# Altium PCB mchf_pro_rf.PcbDoc (part 2 of 4)
Units mm, origin at the board's own origin, x right, y up, seen from the top; angles counter-clockwise.
Board outline 200 x 140.01 mm, 2 copper layers (Top Layer, Bottom Layer); 387 components, 251 nets, 1103 pads, 620 vias.
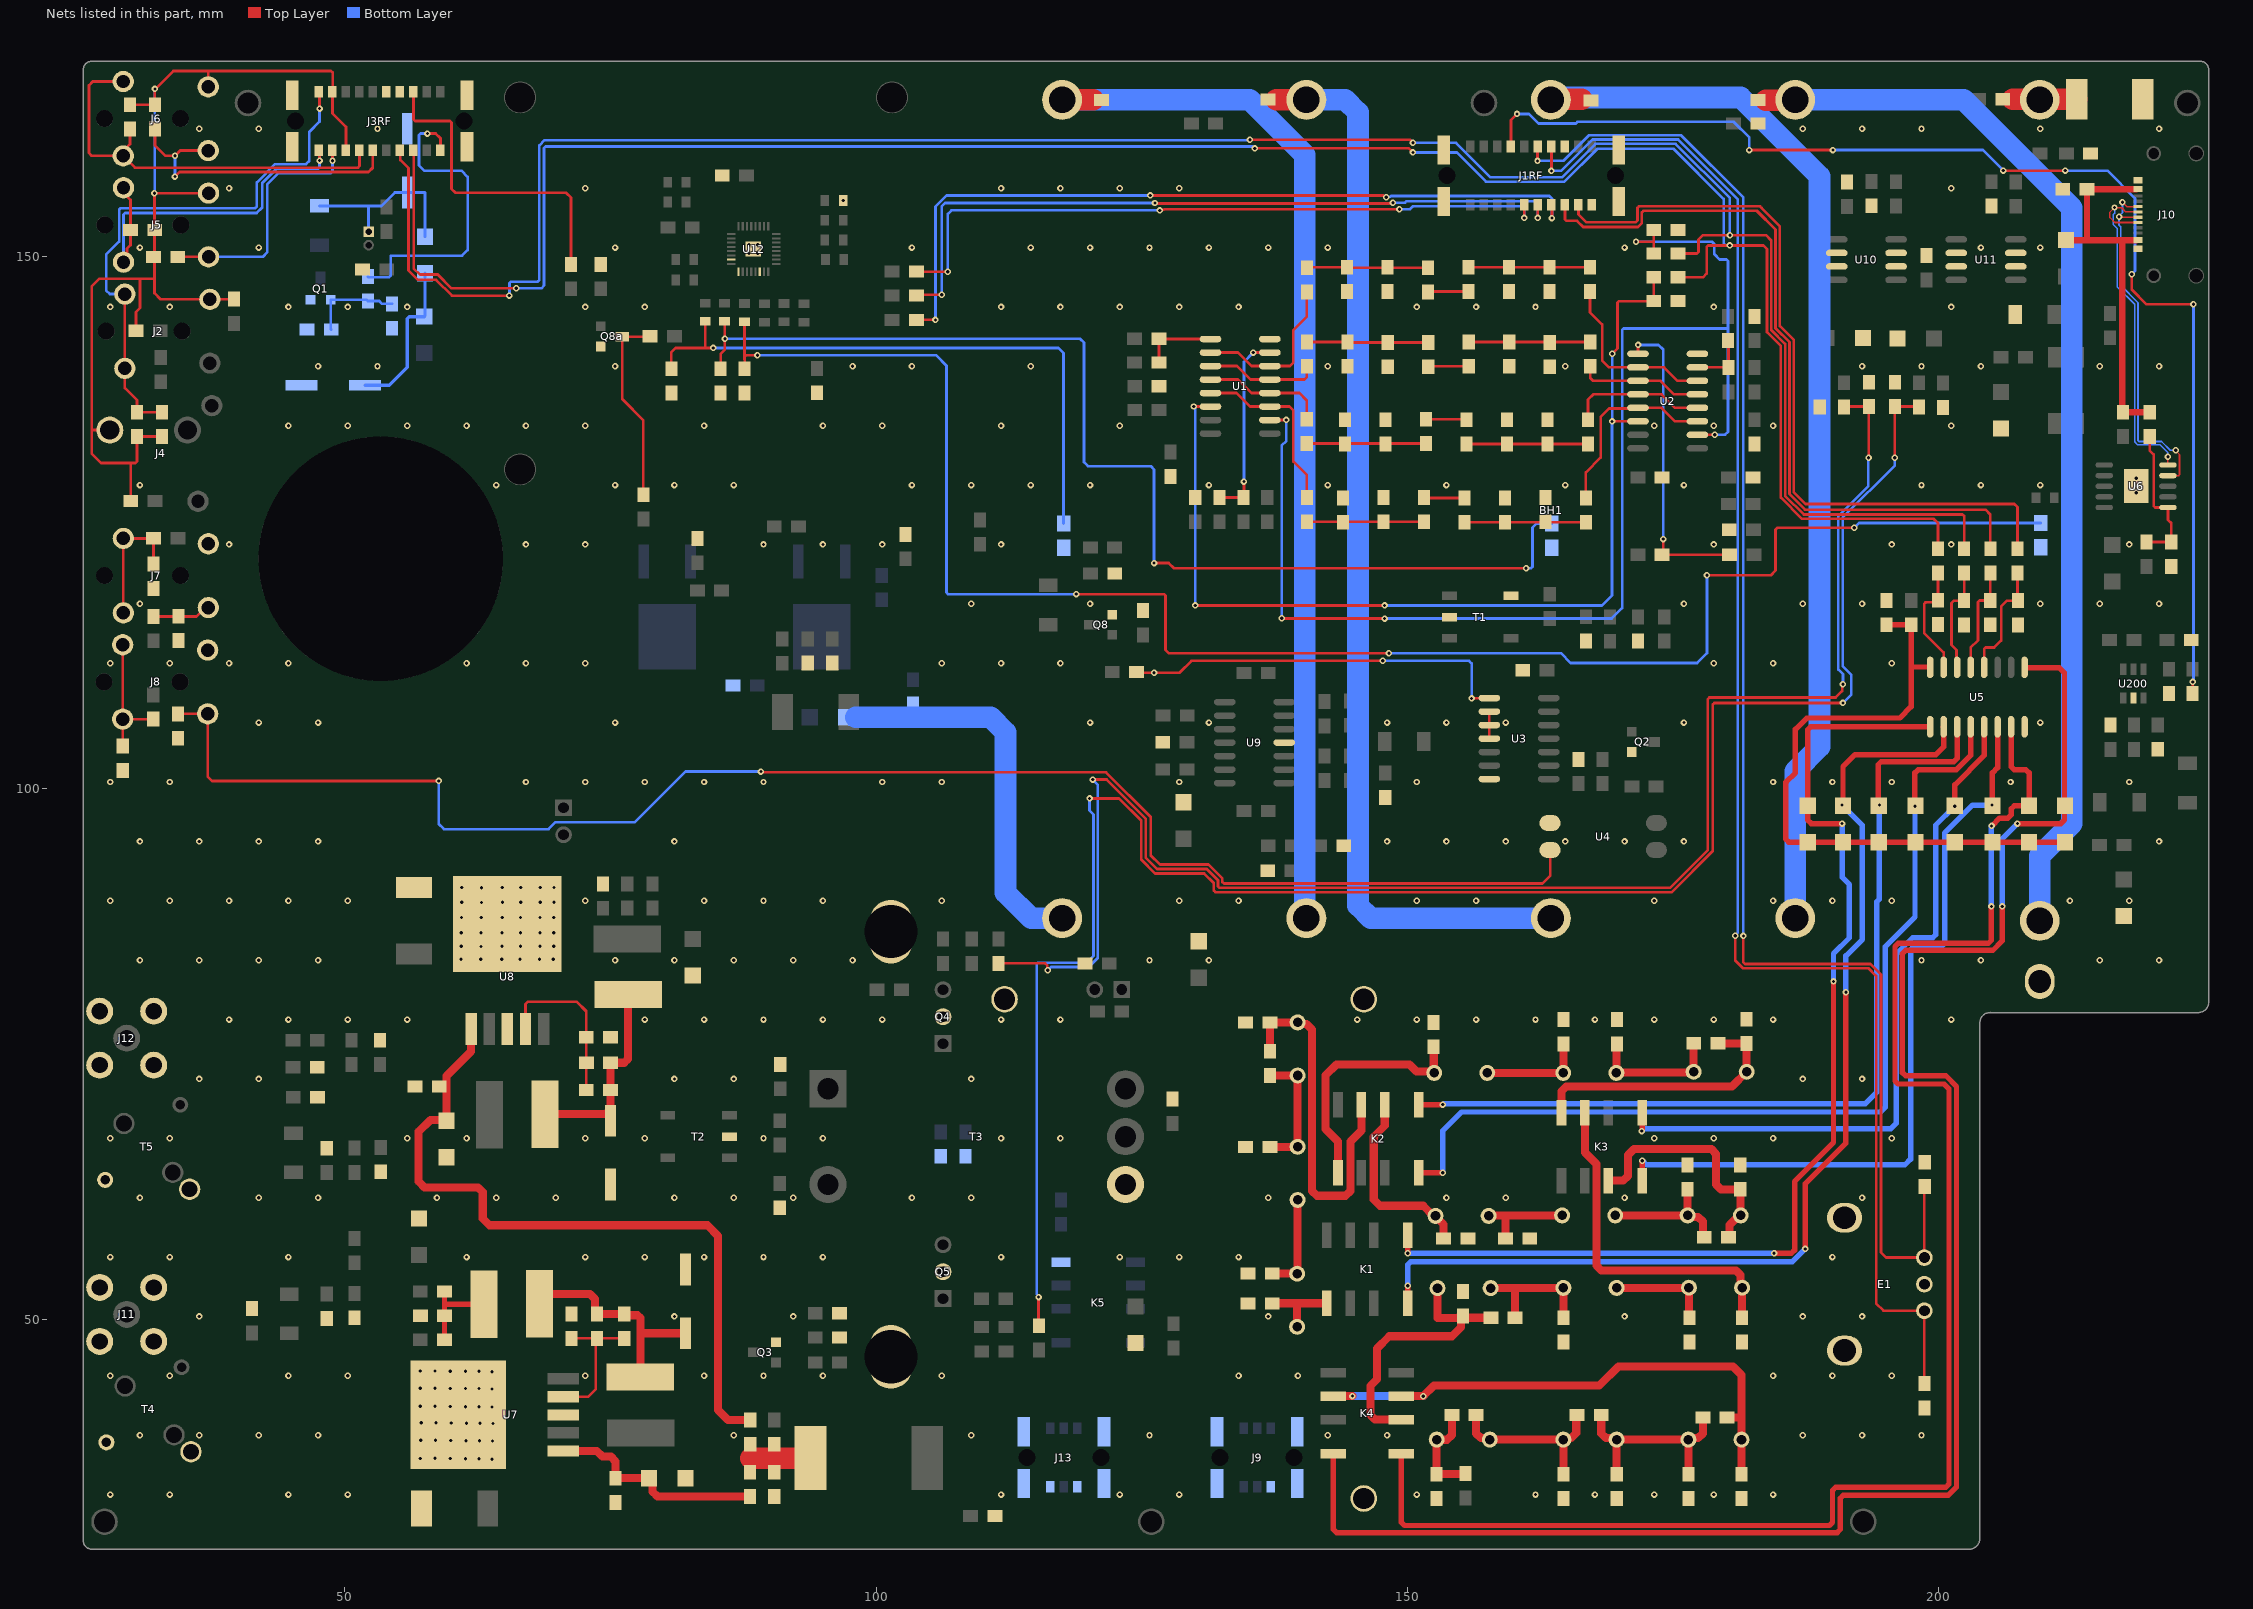
[diagram p2: the nets of this part, all layers, seen from the top]

## Part data
BH1: library part BATT_HOLDER_5S_21700, "LiOn 21700 5S Holder"
C1 C2 C3 C4 C5 C6 C7 C8 C9 C10 C11 C12 C13 C14 C15 C16 C17 C18 C19 C20 C21 C22 C23 C24 C25 C26 C27 C28 C29 C29d C29e C30 C31 C32 C33 C34 C35 C36 C37 C38 C38a C39 C40 C41 C42 C43 C44 C45 C46 C47 C76 C77 C91 C110 C111 C127 C128 C129 C130 C200 C201 C500: library part CAP, "Capacitor"
  C1 C2 C3 C4 C5 C6 C19 C20 C21 C22 C23 C24 C25 C26 C27 C28 C38 C38a C43 C44 C45 C46 C47 C76 C77 C91 C110 C111 C127 C128 C500: Price=0.068, QT Order=QCC-00154
  C7 C15: Notes=COG/NPO, Price=0.124, QT Order=QCC-00082
  C8 C16: Notes=COG/NPO, Price=0.074, QT Order=QCC-00147
  C9 C12 C17: Notes=COG/NPO, Price=0.078, QT Order=QCC-00125
  C10 C13 C18: Notes=COG/NPO, Price=0.058, QT Order=QCC-00084
  C11: Notes=COG/NPO, Price=0.074
  C14: Notes=COG/NPO, Price=0.074, QT Order=QCC-00069
  C29 C29d C29e C30 C31 C32 C33 C34 C35 C36 C37: Order="FN 185-6408", Price=0.01, QT Order=QCC-00259
  C39 C40 C41 C42: Price=0.01, QT Order=QCC-00259
  C129 C130: Price=0.115, QT Order=QCC-00103
  C200 C201: Order="FN 282-1264", Price=0.089, QT Order=QCC-00157
C29a C29b: library part CAP-POL, "Electrolitic capacitor", Price=0.34
  C29a: Order="FN 225-4321", QT Order=QCC-00320
  C29b: Notes="Aluminium capacitor"
C48 C49 C50 C51 C52 C53 C54 C55 C56 C57 C58 C59 C60 C61 C62 C63 C64 C65 C66 C67 C68 C69 C70 C71 C72 C73 C74 C75 C78 C79 C80 C82 C84 C85 C87 C89 C90 C92 C93 C94 C94a C95 C97 C98 C99 C100 C101 C102 C103 C105 C106 C108 C109 C114 C115 C116 C117 C118 C119 C119a C120 C121 C122 C123 C124 C125 C125a C125b C125c C125d C125e C132 C133 C136: library part CAP, "Capacitor", Voltage=100V
  C48 C49 C50 C51 C52 C53 C54 C55 C56 C57 C58 C59 C60 C61 C62 C63 C64 C65 C71 C72 C73 C75: Notes=COG/NPO
  C66 C70: Notes=COG/NPO, Price=0.063, QT Order=QCC-00460
  C67 C68: Notes=COG/NPO, Price=0.143, QT Order=QCC-00142
  C69: Notes=COG/NPO, Price=0.068
  C74: Notes=COG/NPO, Price=0.078, QT Order=QCC-00125
  C78 C79 C80 C82 C84 C85 C87 C89 C90 C92 C93 C94 C94a C95 C97 C98 C99 C100 C101 C102 C103 C105 C106 C108 C109 C114 C115 C116 C117 C125a C125b C125c C125d C125e C132 C133: Price=0.068, QT Order=QCC-00154
C81 C86 C104 C107: library part CAP-POL, "Electrolitic capacitor", Voltage=25V
  C81 C86 C107: Price=0.235, QT Order=QCC-00202
  C104: Price=0.204, QT Order=QCC-00166
C83 C88 C96 C112 C113: library part CAP-POL, "Electrolitic capacitor", Voltage=16V, Price=0.235, QT Order=QCC-00202
D1 D2 D5 D9 D200 D202: "DIODE, SCHOTTKY, 1A, 60V, SOD-123F", QT Order=QCD-00034
  D1 D2 D5 D9: Price=0.085
  D200 D202: Order="FN 151-0694", Price=0.262, QT Price=0.08
D2a D3 D4 D6: library part PMEG6010CEH, "DIODE, SCHOTTKY, 1A, 60V, SOD-123F", Price=0.085, QT Order=QCD-00034
D7 D8: library part PMEG6010CEH, "RF DIODE SCHOTTKY 70V, SOD-123F", Order="DK 1N5711W-FDITR-ND", Price=0.085, QT Order=QCD-00034
E1: library part Encoder, "ALPS Rotary Encoder"
F1 F2: library part Fuse, "Fuse", Function=Fuse, Price=0.134, QT Order=QCI-00216
HS1: library part RD16HHF1_DUAL_HEATSINK, "RF MOSFET x2 heatsink", Order="EB 121171160336", Price=7.375
J1RF J3RF: "SMD male connector, nominal current: 2.2 A, Test voltage: 840 VAC, number of positions: 20, pitch: 1.27 mm, color: black, contact surface: Gold, type of contact: Male connector, mounting: SMD soldering", Manufacturer_Name="Phoenix Contact", Mouser Part Number=651-1373866, Datasheet Link=http://www.phoenixcontact.com/gb/produkte/1373866, Geometry.Height=6.75mm, Manufacturer_Part_Number=1373866, Mouser Price/Stock=https://www.mouser.co.uk/ProductDetail/Phoenix-Contact/1373866?qs=2SLPxufLcgAs0enIXKjUUw%3D%3D
J2 J5 J6: library part MX-387GL, "Jack Socket,Thru-Hole", Order="FN 126-7376"
J4: library part PhoneJack, "Jack Socket 4 pin", Function=Phones, Order="FN 121-7016", Price=1.28
J7 J8: library part Phonejack3, "Jack Socket,Thru-Hole", Notes="post assembly", Price=0.35
  J7: Function=Paddles
  J8: Function=ACC
J9 J13: "SMD male connector, nominal current: 2.2 A, Test voltage: 840 VAC, number of positions: 6, pitch: 1.27 mm, color: black, contact surface: Gold, type of contact: Male connector, mounting: SMD soldering", Manufacturer_Name="Phoenix Contact", Mouser Part Number=651-1373826, Datasheet Link=http://www.phoenixcontact.com/gb/produkte/1373826, Geometry.Height=6.75mm, Manufacturer_Part_Number=1373826, Mouser Price/Stock=https://www.mouser.co.uk/ProductDetail/Phoenix-Contact/1373826?qs=2SLPxufLcgB13Clq%252BEBMrA%3D%3D
J10: "Universal Serial Bus (USB) Shielded I/O Receptacle, Type C, Vertical, Surface Mount, Height 8.8mm, 16 Circuits, Gold (Au) Flash Plating", Manufacturer_Name=Molex, Mouser Part Number=538-219320-0001, Datasheet Link=https://www.molex.com/content/dam/molex/molex-dot-com/products/automated/en-us/salesdrawingpdf/219/219320/2193200001_sd.pdf?inline, Geometry.Height=9.05mm, Manufacturer_Part_Number=219320-0001, Mouser Price/Stock=https://www.mouser.co.uk/ProductDetail/Molex/219320-0001?qs=rQFj71Wb1eXha8qVBIXu3A%3D%3D
J11 J12: library part BNC, "RF COAXIAL, BNC, JACK", Order="FN 171-2350", Price=0.69
K1 K2 K3 K4: "Single-winding Latching Relay", Order="FN 118-1070", Price=2.19
K5: library part "G6KU-2FY 3DC", "Single-winding Latching Relay", Notes="cheaper version from Ali", Price=2.19
L1 L2 L3 L4 L5 L6 L7 L8 L9 L10 L11 L12: library part BPF_IND, "INDUCTOR SMD", Price=0.166
L13: library part LPF_IND, "T37-2 handwound inductor", Inductance=0.3uH, Notes="post assembly", Price=0.20
L14: library part LPF_IND, "T37-2 handwound inductor", Inductance=0.192uH, Notes="post assembly", Price=0.20
L15: library part LPF_IND, "T37-2 handwound inductor", Inductance=0.147uH, Notes="post assembly", Price=0.20
L16 L17: library part LPF_IND, "T37-2 handwound inductor", Inductance=0.9uH, Notes="post assembly", Price=0.20
L18: library part LPF_IND, "T37-2 handwound inductor", Inductance=0.55uH, Notes="post assembly", Price=0.20
L19 L21: library part LPF_IND, "T37-2 handwound inductor", Inductance=1.2uH, Notes="post assembly", Price=0.20
L20: library part LPF_IND, "T37-2 handwound inductor", Inductance=1.5uH, Notes="post assembly", Price=0.20
L22 L24: library part LPF_IND, "T37-2 handwound inductor", Inductance=2.1uH, Notes="post assembly", Price=0.20
L23: library part LPF_IND, "T37-2 handwound inductor", Inductance=4uH, Notes="post assembly", Price=0.20
L25 L27: library part LPF_IND, "T37-2 handwound inductor", Inductance=4.5uH, Notes="post assembly", Price=0.20
L26: library part LPF_IND, "T37-2 handwound inductor", Inductance=5.6uH, Notes="post assembly", Price=0.20
L28 L29 RFC1 RFC2 RFC3: library part TDK-NLV25T, "POWER INDUCTOR, 47UH, 1210", Notes="Power inductor", Price=0.166
LD1 LD2 LD3 LD4 LD5: library part LED2, "LED 3mm", Price=0.116, QT Order=QCD-00052, Revision="July-2002: Re-released for DXP Platform."
M1 M2 M3 M4 M5 M6 M7 M8 M10 M11 M12 M13 M14 M15 M16 M17 M18 M19 M20 M21 M22 M23 M200 R1 R2 R3 R4 R5 R6 R7 R8 R9 R10 R11 R12 R13 R13a R13b R13e R14 R15 R16 R17 R18 R19 R20 R21 R22 R23 R24 R25 R26 R27 R28 R29 R30 R34 R34g R34h R35 R36 R36A R37 R38 R38a R39 R40 R41 R42 R43 R44 R45 R46 R47 R48 R49 R50 R51 R52 R53 R54 R55 R56 R57 R58 R60 R61 R62 R63 R63a R64 R65 R66 R67 R68 R69 R70 R70a R71 R72 R73 R74 R75 R76 R76a R76f R79 R80 R81 R82 R85 R200 R201 R202 R203 R500 R501: library part RES, "Resistor"
  M1 M2 M3 M4 M5 M6 M7 M8 M10 M11 M12 M13 M14 M15 M16 M17 M18 M19 M20 M21 M22 M23 M200: Price=0.009, QT Order=QCR-00268
  R1 R2 R11 R12: Price=0.021, QT Order=QCR-00373
  R3 R4 R5 R6 R7 R8 R9 R10 R20 R35 R36A R37 R38a R41: Price=0.024, QT Order=QCR-00341
  R13 R13e R14: Order="FN 146-9929", Price=0.021, QT Order=QCR-00365
  R13a R13b: Order="FN 207-8984", Price=0.02, QT Order=QCR-00412
  R15: Order="FN 933-2375", Price=0.027, QT Order=QCR-00301
  R16 R17 R18: Price=0.027, QT Order=QCR-00301
  R19 R42 R43 R44 R47 R48 R49 R57 R58 R60 R61 R76a: Price=0.061, QT Order=QCR-00579
  R21 R22 R23 R24 R25 R26 R27 R28: Price=0.017, QT Order=QCR-00427
  R29 R30 R34 R34g R34h R500 R501: Notes="Tolerance better than 1%", Price=0.009
  R36: Order=71-CRCW08053K30FKEAC, Price=0.024, QT Order=QCR-00341
  R38: Order=667-ERJ-6GEYJ562V, Price=0.024, QT Order=QCR-00341
  R45 R46 R50 R51 R52 R53 R62 R63 R63a R64 R65 R66: Price=0.007, QT Order=QCR-00309
  R54: Price=0.013, QT Order=QCR-00279
  R55 R56 R80 R82: Price=0.046, QT Order=QCR-00333
  R67 R69 R71 R74 R75 R76 R76f: Price=0.046
  R68: Notes="Tolerance better than 1%", Order=652-CR2512AF/1R00ELF, Price=0.009, QT Order=QCR-00268
  R79 R81: Price=0.052, QT Order=QCR-00293
  R85: Price=0.012, QT Order=QCR-00339
  R200: Order="FN 157-6459", Price=0.061, QT Order=QCR-00326
  R201: Order="FN 200-8383", Price=0.03, QT Order=QCR-00341
  R202 R203: Order="FN 188-7289", Price=0.075, QT Order=QCR-00333, QT Price=0.03
M9 M9a M9b M9c M9d M9e M9f M9i M9j M9k M9m M9p M9u M9x M9z: library part Link, "Link", Published=8-Jun-2000, Publisher="Altium Limited", Revision="July-2002: Re-released for DXP Platform."
P1: library part MHDR1X2, "Header, 2-Pin", LatestRevisionDate=17-Jul-2002, LatestRevisionNote="Re-released for DXP Platform.", Publisher="Altium Limited"
Q1 Q2 Q3 Q8 Q8a: library part MOSFET-N, "N-Channel MOSFET", Price=0.231, QT Order=QCT-00022, QT Price=0.28
Q4 Q5: "Silicon RF Power MOS FET", Order="EB 121171160336", Price=7.375
Q6 Q7: "N-Channel Enhancement Mode Field Effect Transistor, TO-252", Order="FN 108-1300", Price=0.161
RFC4 RFC5: library part FER_BEAD, "BN43-2402 1t choke", Notes="post assembly", Price=0.298
RFC6 RFC7: library part TDK-NLV25T, "INDUCTOR, SIGNAL LINE, 4.7UH, 1005", Price=0.166
RFC8 RFC9: library part TDK-NLV25T, "INDUCTOR, SIGNAL LINE, 47UH, 1005", Price=0.166
RFC200: library part Inductor, "Power Inductor", Price=0, QT Order=QCL-00097, QT Price=0.085
T1 T2: "Transformer 4:1", Price=0.298
T3: library part PA_OUT_TR, "1:3 BN-43-3312 transformer", Notes="post assembly", Price=0.534
T4 T5: library part SWR_TR, "SWR Bridge transformer", Notes="post assembly", Price=0.795
TF1: library part FAN5V, "5V Turbine Fan, 40x40mm", Order="FN 118-1070", Price=2.19
U1 U2: "Dual 4:1 Demux/Analog Switch", Price=0.69
U3: "Quad 2-input NOR gate", Price=0.38, QT Order=QCI-01079
U4: library part ISP817XSM, "OPTOCOUPLER, SMDIP-4, TR O/P", Notes="v 0.6 RF board opto can do, but more expensive", Order="FN 168-3292", Price=0.26
U5: "BCD DECODER/DRIVER", Price=1.22
U6: "USB-PD trigger chip", Order="DK 336-2518-ND", Price=8.72
U7 U8: "V REG ADJ +5/20V, SMPS TO-263-5", Notes="In bulk from Ali", Price=1.28
U9: "Dual Wideband, High Output Current / Operational Amplifier with Current Limit", Price=0.38
U10 U11: "100 mA, Adjustable Output,  LDO Voltage Regulator with  60 V Load Dump Protection", Price=0.39
U12: "Hardware", Manufacturer_Name="Texas Instruments", Mouser Part Number=595-BQ40Z80RSMR, Arrow Part Number=BQ40Z80RSMR, Arrow Price/Stock=https://www.arrow.com/en/products/bq40z80rsmr/texas-instruments, Datasheet Link=https://www.arrow.com/en/products/bq40z80rsmr/texas-instruments, Height=1mm, Manufacturer_Part_Number=BQ40Z80RSMR, Mouser Price/Stock=https://www.mouser.co.uk/ProductDetail/Texas-Instruments/BQ40Z80RSMR?qs=%252BEew9%252B0nqrAXLQXqHAvhdw%3D%3D
U200: "Charge Pump", Notes="Originally from Thomas, if not Ali", Order=Hotmcu.com, Price=0.5, QT Order=QCI-01775, QT Price=0.27

## Free pads (board coordinates)
  round 2.5 hole 2: 1(27.4,30.98) 1(40.9,164.48) 1(112.09,80.142) 1(125.9,30.98) 1(145.898,33.164) 1(145.898,80.142) 1(157.205,164.48) 1(192.9,30.98) 1(223.396,164.48)
  round 23 hole 23 unplated paste+0 mask+0: sp_cut(53.391,121.59)
  oval 2.8x3.302 hole 2.159: ""(209.5,81.813)

## Via types
v1: diameter 0.61, hole 0.305, Top Layer to Bottom Layer, 620 vias

## Nets (pads, with @x,y where several pads share a name; then routed paths per layer and width w, separated by ;. In a path a pad name is that pad's centre, name@x,y a point inside that pad or via, vN(x,y) a via of type N, cw(c..) or ccw(c..) an arc to the next point about the centre after c; other vN are vias at no path point)
AGND: C30.1 C31.2 C32.2 C33.1 C34.1 C35.1 C36.1 C37.1 J2.S J3RF.A2 J3RF.A13 J4.S J5.S J6.S R14.2 | length 104.7
  Top Layer w0.254: J4.S@27.895,133.7 26.19,133.7 ; C35.1@29.794,164.313 C34.1@32.157,164.313 32.119,164.35 32.153,164.384 32.138,164.399 v1(32.138,165.797) 32.183,165.797 33.877,167.492 37.207,167.492 ; C32.2@29.87,127.025 29.87,130.55 29.82,130.601 ; C31.2@30.353,143.053 30.353,144.247 30.357,144.252 30.357,144.803 30.734,145.18 30.734,147.944 ; R14.2@32.791,133.096 C30.1@30.455,133.096 30.455,130.75 30.306,130.601 29.82,130.601 ; J6.S@37.16,166 37.16,167.444 37.207,167.492 ; J5.S@37.185,156 36.944,156.24 36.682,155.978 v1(32.09,155.978) 32.106,155.962 32.106,147.944 ; C33.1@39.573,146.025 39.549,146 J2.S@37.312,146 32.689,146 32.106,146.583 32.106,147.944 ; J3RF.A13@50.116,160.03 50.114,160.032 50.114,162.23 48.845,163.499 48.845,165.529 48.864,165.548 48.864,167.343 48.715,167.492 37.207,167.492 ; 26.19,133.7 26.19,147.196 26.938,147.944 30.734,147.944 ; 26.19,133.7 26.19,131.493 27.082,130.601 29.82,130.601 ; 30.734,147.944 32.106,147.944
  Bottom Layer w0.254: v1(32.09,155.978) 32.138,156.026 v1(32.138,165.797)
ANT_RX_ON: U3.2 U3.3 U3.4 | length 2.5
  Top Layer w0.254: U3.4@157.709,104.673 U3.3@157.709,105.943 U3.2@157.709,107.213
ANT_TX_ON: R85.1 U3.1 | length 37.1
  Top Layer w0.254: R85.1@124.511,110.922 124.562,110.871 v1(126.162,110.871) 128.575,110.871 129.687,111.983 v1(147.688,111.983) ; v1(156.042,108.449) 156.059,108.466 157.692,108.466 U3.1@157.709,108.483
  Bottom Layer w0.254: v1(147.688,111.983) 155.809,111.983 156.042,111.75 v1(156.042,108.449)
B1: M1.1 R1.1 U1.7 | length 17.8
  Top Layer w0.254: R1.1@132.327,127.364 M1.1@134.571,127.364 134.62,127.413 v1(134.62,128.854) ; v1(135.493,140.995) U1.7@137.058,140.995
  Bottom Layer w0.254: v1(134.62,128.854) 134.62,140.122 v1(135.493,140.995)
B2: M2.1 R11.2 U1.9 | length 7.1
  Top Layer w0.254: R11.2@126.619,140.063 M2.1@126.619,142.291 126.644,142.265 U1.9@131.47,142.265
B3: M4.2 R2.1 U2.7 | length 5.5
  Top Layer w0.254: U2.7@177.286,139.602 180.184,139.602 R2.1@180.213,139.573 180.213,142.062 M4.2@180.162,142.113
B4: M3.2 R12.2 U2.9 | length 29
  Top Layer w0.254: U2.9@171.698,140.872 171.704,140.878 v1(171.704,141.707) ; M3.2@173.971,121.963 M3.2@174.072,122.065 ; v1(174.072,123.444) M3.2@174.072,122.065 ; R12.2@180.315,121.961 174.176,121.961 M3.2@174.072,122.065
  Bottom Layer w0.254: v1(171.704,141.707) 173.634,141.707 174.072,141.269 v1(174.072,123.444)
BAND0: J3RF.A18 M5.1 M14.1 | length 211.1
  Top Layer w0.254: J3RF.A18@56.466,160.03 56.49,160.006 56.49,148.924 57.079,148.335 58.754,148.335 60.048,147.041 v1(66.142,147.041) ; v1(135.64,160.206) 150.138,160.206 v1(150.52,159.823) ; M5.1@175.47,148.076 177.801,148.076 178.153,148.428 178.153,150.92 178.302,151.069 v1(180.341,151.069) 183.489,151.069 183.829,150.729 183.829,142.908 185.135,141.601 185.135,127.346 187.136,125.345 199.526,125.345 199.921,124.95 M14.1@199.921,122.53
  Bottom Layer w0.254: v1(66.142,147.041) 68.501,147.041 68.756,147.296 68.756,160.227 68.905,160.376 135.47,160.376 v1(135.64,160.206) ; v1(150.52,159.823) 154.655,159.823 157.404,157.074 164.77,157.074 167.869,160.172 175.041,160.172 179.758,155.455 179.758,151.246 179.907,151.098 180.312,151.098 v1(180.341,151.069)
BAND1: J3RF.A17 M6.1 M15.1 | length 215.2
  Top Layer w0.254: J3RF.A17@55.196,160.03 55.232,159.994 55.232,159.115 56.007,158.34 56.007,148.714 56.886,147.835 58.594,147.835 60.078,146.352 65.478,146.352 v1(65.481,146.355) ; v1(135.178,161.028) 150.224,161.028 v1(150.52,160.731) ; M6.1@175.47,150.313 177.23,150.313 177.397,150.48 177.397,151.638 177.801,152.042 v1(180.343,152.042) 183.742,152.042 184.236,151.549 184.236,143.111 185.547,141.8 185.547,127.509 187.301,125.755 202.238,125.755 202.387,125.607 M15.1@202.387,122.53
  Bottom Layer w0.254: v1@65.507,146.346 65.507,147.52 65.655,147.669 68.165,147.669 68.313,147.817 68.313,160.49 68.809,160.985 135.135,160.985 v1(135.178,161.028) ; v1(150.52,160.731) 154.587,160.731 157.839,157.48 164.528,157.48 167.678,160.63 175.243,160.63 180.343,155.529 v1(180.343,152.042)
BAND2: J1RF.A3 M16.1 | length 71.8
  Top Layer w0.254: J1RF.A3@164.825,154.889 164.825,153.539 164.974,153.391 165.964,153.391 166.548,152.806 171.677,152.806 172.06,153.19 172.06,154.188 172.209,154.337 182.874,154.337 184.642,152.568 184.642,143.279 185.953,141.968 185.953,127.678 187.418,126.213 204.388,126.213 204.845,125.755 204.845,122.535 M16.1@204.851,122.53
BAND3: J1RF.A2 M17.1 | length 73.4
  Top Layer w0.254: J1RF.A2@166.095,154.889 166.095,153.992 166.824,153.264 171.497,153.264 171.646,153.412 171.646,154.613 171.795,154.762 183.164,154.762 183.313,154.613 183.313,154.593 185.048,152.857 185.048,143.491 186.36,142.18 186.36,127.846 187.453,126.752 207.104,126.752 207.402,126.455 M17.1@207.402,122.53
BIAS0: C114.2 R50.2 RFC6.2 | length 151
  Top Layer w0.254: R50.2@111.512,83.515 115.908,83.515 116.118,83.306 116.118,82.917 v1(116.154,82.88) ; v1(120.399,100.813) 121.695,100.813 125.371,97.136 125.371,93.469 126.435,92.405 131.115,92.405 132.182,91.338 132.182,90.776 132.33,90.627 174.711,90.627 178.265,94.182 178.265,108.382 178.414,108.53 190.293,108.53 190.915,109.152 190.915,109.711 v1(190.983,109.779) ; RFC6.2@191.067,135.865 191.118,135.915 C114.2@193.429,135.915 193.398,135.884 v1(193.398,131.099)
  Bottom Layer w0.254: v1(116.154,82.88) 116.179,82.88 116.481,83.182 120.012,83.182 120.874,84.044 120.874,100.317 120.399,100.792 v1(120.399,100.813) ; v1(190.983,109.779) 190.983,110.744 190.551,111.176 190.551,125.628 193.37,128.448 193.37,131.072 v1(193.398,131.099)
BIAS1: C115.2 R51.2 RFC7.2 | length 180.2
  Top Layer w0.254: v1(115.291,52.121) 115.291,49.451 R51.2@115.325,49.417 ; v1(120.091,99.035) 122.858,99.035 124.951,96.942 124.951,93.289 126.258,91.983 130.877,91.983 131.775,91.084 131.775,90.37 131.924,90.221 174.879,90.221 178.73,94.072 178.73,107.877 178.879,108.026 v1(190.983,108.026) ; v1(195.868,131.099) C115.2@195.868,135.915 198.103,135.915 RFC7.2@198.154,135.865
  Bottom Layer w0.254: v1(115.291,52.121) 115.291,52.217 115.112,52.396 115.112,83.44 115.261,83.588 119.843,83.588 120.467,84.212 120.467,97.522 120.091,97.898 v1(120.091,99.035) ; v1(190.983,108.026) 191.77,108.814 191.77,110.668 190.957,111.481 190.957,125.46 195.868,130.37 v1(195.868,131.099)
BMS_PRES: J1RF.A4 R76.2 | length 74.2
  Top Layer w0.254: R76.2@103.801,144.064 103.806,144.069 v1(105.588,144.069) ; v1(125.806,155.778) 147.732,155.778 147.91,155.6 v1(148.006,155.6) ; J1RF.A4@163.555,154.889 163.597,154.848 v1(163.597,153.646)
  Bottom Layer w0.254: v1(105.588,144.069) 105.588,154.737 106.629,155.778 v1(125.806,155.778) ; v1(148.006,155.6) 148.074,155.668 148.387,155.668 148.446,155.727 163.347,155.727 163.597,155.478 v1(163.597,153.646)
BMS_PWM: J3RF.A8 R76f.2 | length 30.4
  Top Layer w0.254: J3RF.A8@56.466,165.53 56.466,162.929 56.615,162.78 59.899,162.78 60.048,162.631 60.048,156.405 60.42,156.032 70.841,156.032 71.29,155.582 R76f.2@71.29,149.279
BMS_SCL: J1RF.A6 R74.2 | length 65.2
  Top Layer w0.254: R74.2@103.801,148.619 103.855,148.565 103.88,148.59 v1(106.756,148.59) ; v1(126.696,154.372) 126.764,154.44 127.085,154.44 127.127,154.483 v1(149.25,154.483) ; v1(160.998,153.668) 160.998,154.872 J1RF.A6@161.015,154.889
  Bottom Layer w0.254: v1(106.756,148.59) 106.756,154.026 107.103,154.372 v1(126.696,154.372) ; v1(149.25,154.483) 150.238,154.483 150.517,154.762 160.836,154.762 160.985,154.613 160.985,153.68 v1(160.998,153.668)
BMS_SDA: J1RF.A5 R75.2 | length 69.8
  Top Layer w0.254: R75.2@103.801,146.363 103.869,146.431 v1(106.172,146.431) ; v1(126.238,155.067) 126.289,155.016 148.465,155.016 148.545,155.096 v1(148.641,155.096) ; v1(162.27,153.657) 162.27,154.874 J1RF.A5@162.285,154.889
  Bottom Layer w0.254: v1(106.172,146.431) 106.172,154.737 106.502,155.067 v1(126.238,155.067) ; v1(148.641,155.096) 149.787,155.096 149.936,155.245 162.121,155.245 162.27,155.096 v1(162.27,153.657)
BND0: C23.1 M5.2 U1.14 U2.14 | length 95.9
  Top Layer w0.254: v1@129.894,135.916 U1.14@131.47,135.915 ; v1(130.038,117.196) v1(147.853,117.196) ; U1.14@131.451,135.896 U1.14@131.47,135.915 ; v1(169.258,134.512) 169.276,134.53 171.69,134.53 U2.14@171.698,134.522 ; v1(169.266,140.872) 169.774,141.38 169.774,145.686 169.922,145.834 C23.1@173.176,145.834 173.176,148.068 M5.2@173.184,148.076
  Bottom Layer w0.254: v1(129.894,135.917) 130.038,135.772 v1(130.038,117.196) ; v1(147.853,117.196) 168.3,117.196 169.258,118.154 v1(169.258,134.512) 169.262,134.516 169.262,140.868 v1(169.266,140.872)
BND1: C24.1 M6.2 U1.2 U2.2 | length 122
  Top Layer w0.254: U1.2@137.045,134.632 U1.2@137.058,134.645 137.063,134.65 138.6,134.65 v1(138.604,134.655) ; v1(138.168,115.986) 138.195,115.96 v1(147.853,115.96) ; v1(171.509,151.42) 171.514,151.415 173.184,151.415 ; M6.2@173.156,150.284 M6.2@173.184,150.313 173.184,151.415 ; C24.1@173.176,152.525 173.184,152.517 173.184,151.415 ; U2.2@177.286,133.252 177.294,133.259 178.921,133.259 v1(178.928,133.267)
  Bottom Layer w0.254: v1(138.168,115.986) 138.168,132.25 138.604,132.686 v1(138.604,134.655) ; v1(147.853,115.96) 169.218,115.96 170.204,116.947 170.204,143.107 170.353,143.256 180.137,143.256 180.162,143.231 ; v1(171.509,151.42) 178.658,151.42 178.872,151.206 178.872,150.271 179.384,149.758 180.013,149.758 180.162,149.61 180.162,143.231 ; v1(178.928,133.267) 179.901,133.267 180.162,133.528 180.162,143.231
BST_EN: J1RF.A17 R200.1 | length 117.3
  Top Layer w0.254: J1RF.A17@159.745,160.389 159.745,162.885 v1(160.311,163.451) ; v1(182.169,160.045) v1(190.043,160.045) ; v1(206.073,158.115) v1(211.903,158.115) ; v1(218.161,148.361) 218.161,146.914 219.541,145.533 v1(223.964,145.533) ; R200.1@223.886,108.915 223.91,108.939 v1(223.91,109.999)
  Bottom Layer w0.254: v1(160.311,163.451) 161.44,163.451 162.344,162.547 165.852,162.547 166.018,162.713 180.67,162.713 182.169,161.214 v1(182.169,160.045) ; v1(190.043,160.045) 204.143,160.045 v1(206.073,158.115) ; v1(211.903,158.115) 215.857,158.115 218.468,155.504 218.468,148.688 218.161,148.38 v1(218.161,148.361) ; v1(223.91,109.999) 223.964,110.053 v1(223.964,145.533)
CHG_PWM: Q8a.3 R70.1 R70a.2 | length 18.3
  Top Layer w0.254: R70.1@78.105,127.61 78.105,134.62 76.124,136.601 Q8a.3@76.124,142.494 78.695,142.494 R70a.2@78.734,142.533
DM: J10.A7 J10.B7 U6.5 | length 34
  Top Layer w0.152: J10.B7@218.726,153.23 216.573,153.23 216.103,153.699 216.103,154.212 v1(216.535,154.644) 216.567,154.611 217.211,154.611 217.592,154.23 J10.A7@218.726,154.23 ; v1(221.564,131.183) 221.564,130.417 U6.5@221.567,130.415
  Bottom Layer w0.152: v1(216.535,154.644) 216.561,154.617 216.561,154.115 216.43,153.984 216.43,153.038 216.803,152.665 216.803,147.171 218.441,145.533 218.441,132.588 218.709,132.32 220.81,132.32 221.531,131.599 221.531,131.217 v1(221.564,131.183)
DP: J10.A6 J10.B6 U6.4 | length 34.2
  Top Layer w0.152: v1(216.964,153.763) 216.999,153.728 218.724,153.728 J10.A6@218.726,153.73 ; v1(217.283,155.145) 217.698,154.73 J10.B6@218.726,154.73 ; U6.4@221.567,129.415 222.568,129.415 222.658,129.504 222.658,131.395 222.301,131.752 v1(222.301,131.793)
  Bottom Layer w0.152: v1(217.283,155.145) 217.283,154.155 216.964,153.836 216.964,152.983 217.115,152.832 217.115,147.318 218.746,145.688 218.746,132.714 218.835,132.625 220.961,132.625 221.793,131.793 v1(222.301,131.793)
ENC_I: C29d.1 E1.A J1RF.A14 | length 151.5
  Top Layer w0.254: J1RF.A14@163.555,160.389 J1RF.A14@163.555,160.389 v1@163.556,158.09 ; v1(180.848,86.106) 180.848,83.8 181.59,83.058 193.396,83.058 194.113,82.341 194.113,51.512 194.792,50.832 E1.A@198.644,50.832 C29d.1@198.644,43.967
  Bottom Layer w0.254: v1(163.551,158.09) 164.468,158.09 167.415,161.036 175.475,161.036 181.094,155.416 181.094,86.433 180.848,86.186 v1(180.848,86.106)
ENC_Q: C29e.1 E1.B J1RF.A15 | length 146.7
  Top Layer w0.254: v1(162.24,159.029) 162.24,160.344 J1RF.A15@162.285,160.389 ; v1(181.622,86.1) 181.61,86.089 181.61,83.613 181.759,83.464 193.564,83.464 194.562,82.466 194.562,56.313 195.044,55.832 E1.B@198.644,55.832 198.644,62.488 C29e.1@198.674,62.518
  Bottom Layer w0.254: v1(162.24,159.029) 164.662,159.029 167.075,161.442 175.74,161.442 181.61,155.572 181.61,86.112 v1(181.622,86.1)
FAN_ON: J3RF.A20 R13.2 | length 29.7
  Top Layer w0.254: v1(57.781,161.602) 58.564,161.602 59.006,161.16 J3RF.A20@59.006,160.03
  Bottom Layer w0.254: R13.2@52.181,148.137 52.223,148.094 54.182,148.094 54.331,148.243 54.331,150.114 61.036,150.114 61.57,150.647 61.57,157.53 60.985,158.115 57.48,158.115 56.998,158.598 56.998,161.453 57.146,161.602 v1(57.781,161.602)
GND: BH1.11 BH1.13 BH1.15 C1.2 C2.2 C7.2 C8.2 C9.1 C10.1 C15.2 C16.2 C17.1 C18.1 C23.2 C24.2 C25.2 C26.2 C27.2 C28.2 C29.2 C29a.2 C29b.2 C29d.2 C29e.2 C38.2 C38a.2 C39.2 C40.1 C41.2 C42.1 C43.2 C44.1 C45.1 C46.1 C47.1 C48.1 C50.1 C51.1 C53.1 C55.1 C56.1 C57.1 C58.1 C60.1 C61.1 C62.1 C63.1 C65.1 C66.2 C67.2 C68.2 C70.2 C71.2 C72.2 C73.2 C75.2 C76.1 C77.2 C78.1 C79.1 C80.2 C81.2 C83.2 C84.2 C85.2 C86.2 C88.2 C89.2 C90.2 C94.1 C94a.1 C95.1 C96.2 C101.1 C103.2 C104.2 C105.1 C106.1 C107.2 C108.2 C109.2 C110.2 C111.1 C112.2 C113.2 C114.1 C115.1 C116.1 C117.2 C122.2 C123.1 C124.1 C125.2 C125a.1 C125b.2 C125c.2 C125d.2 C125e.2 C127.1 C128.2 C129.1 C130.2 C132.1 C133.2 C200.1 C201.2 C500.2 D2.1 D3.1 D4.1 E1.1 E1.2 E1.C HS1.1 HS1.2 J1RF.A1 J1RF.A13 J1RF.MP1 J1RF.MP2 J1RF.MP3 J1RF.MP4 J3RF.A6 J3RF.A7 J3RF.MP1 J3RF.MP2 J3RF.MP3 J3RF.MP4 J7.S J8.S J9.B1 J9.MP1 J9.MP2 J9.MP3 J9.MP4 J10.A1 J10.A12 J10.B1 J10.B12 J11.2 J12.2 J13.A1 J13.A3 J13.MP1 J13.MP2 J13.MP3 J13.MP4 K5.4 L1.1 L2.1 L3.1 L4.1 L9.1 L10.1 L11.1 L12.1 LD1.2 LD2.2 LD4.2 LD5.2 M9c.2 pad. pad.1@112.09,80.142 pad.1@145.898,33.164 pad.1@145.898,80.142 Q1.2 Q2.2 Q3.2 Q4.2 Q5.2 Q8.2 Q8a.2 R3.1 R6.2 R7.1 R10.2 R13e.2 R35.2 R37.2 R40.2 R42.1 R57.1 R58.1 R61.2 R68.2 R69.2 R76a.2 R79.1 R80.1 R81.2 R82.2 R201.1 R203.2 R501.2 T1.2 T1.6 T2.2 T3.5 T4.1 T4.5 T5.1 T5.5 U1.8 U2.8 U3.7 U4.3 U5.8 U6.0 U7.3 U8.3 U9.4 U10.2 U10.3 U10.6 U10.7 U11.2 U11.3 U11.6 U11.7 U12.7 U12.9 U12.14 U12.33 U200.2
  other v1: 27.94,33.528 33.528,33.528 44.704,33.528 50.292,33.528 111.76,33.528 122.936,33.528 128.524,33.528 150.876,33.528 162.052,33.528 167.64,33.528 173.228,33.528 178.816,33.528 184.404,33.528 63.856,36.863 59.929,36.914 61.359,36.899 62.636,36.901 57.109,36.932 58.496,36.939 63.906,38.564 59.98,38.616 61.41,38.601 62.687,38.603 57.159,38.633 58.547,38.641 30.734,39.116 36.322,39.116 41.91,39.116 47.498,39.116 86.614,39.116 108.966,39.116 125.73,39.116 142.494,39.116 148.082,39.116 187.198,39.116 192.786,39.116 198.374,39.116 63.957,40.215 60.031,40.267 61.461,40.252 62.738,40.254 57.21,40.284 58.598,40.292 63.856,41.765 59.929,41.816 61.359,41.801 62.636,41.803 57.109,41.834 58.496,41.841 63.856,43.467 59.929,43.518 61.359,43.503 62.636,43.505 57.109,43.536 58.496,43.543 27.94,44.704 33.528,44.704 44.704,44.704 50.292,44.704 72.644,44.704 83.82,44.704 89.408,44.704 94.996,44.704 106.172,44.704 134.112,44.704 139.7,44.704 184.404,44.704 189.992,44.704 195.58,44.704 63.856,45.092 59.929,45.143 61.359,45.129 62.636,45.131 57.109,45.161 58.496,45.168 36.322,50.292 81.026,50.292 92.202,50.292 136.906,50.292 170.434,50.292 187.198,50.292 192.786,50.292 27.94,55.88 33.528,55.88 44.704,55.88 61.468,55.88 72.644,55.88 78.232,55.88 83.82,55.88 89.408,55.88 94.996,55.88 111.76,55.88 122.936,55.88 128.524,55.88 134.112,55.88 189.992,55.88 30.734,61.468 41.91,61.468 47.498,61.468 58.674,61.468 64.262,61.468 69.85,61.468 81.026,61.468 86.614,61.468 92.202,61.468 103.378,61.468 108.966,61.468 136.906,61.468 153.67,61.468 159.258,61.468 170.434,61.468 192.786,61.468 27.94,67.056 33.528,67.056 55.88,67.056 61.468,67.056 72.644,67.056 78.232,67.056 89.408,67.056 94.996,67.056 111.76,67.056 117.348,67.056 173.228,67.056 178.816,67.056 184.404,67.056 195.58,67.056 36.322,72.644 41.91,72.644 81.026,72.644 86.614,72.644 108.966,72.644 187.198,72.644 192.786,72.644 39.116,78.232 44.704,78.232 50.292,78.232 55.88,78.232 78.232,78.232 83.82,78.232 89.408,78.232 94.996,78.232 100.584,78.232 111.76,78.232 117.348,78.232 145.288,78.232 150.876,78.232 156.464,78.232 162.052,78.232 167.64,78.232 173.228,78.232 178.816,78.232 184.404,78.232 201.168,78.232 30.734,83.82 36.322,83.82 41.91,83.82 47.498,83.82 75.438,83.82 81.026,83.82 86.614,83.82 92.202,83.82 97.79,83.82 125.73,83.82 131.318,83.82 198.374,83.82 203.962,83.82 215.138,83.82 220.726,83.82 60.936,83.898 62.796,83.896 64.767,83.898 66.497,83.898 68.333,83.898 69.629,83.898 60.975,85.117 62.834,85.115 64.805,85.117 66.535,85.117 68.372,85.117 69.667,85.117 60.973,86.395 62.833,86.393 64.803,86.395 66.534,86.395 68.37,86.395 69.665,86.395 60.988,87.824 62.847,87.823 64.818,87.824 66.548,87.824 68.384,87.824 69.68,87.824 61.013,89.257 62.872,89.256 64.843,89.257 66.573,89.257 68.409,89.257 69.705,89.257 27.94,89.408 33.528,89.408 39.116,89.408 44.704,89.408 50.292,89.408 72.644,89.408 83.82,89.408 89.408,89.408 94.996,89.408 106.172,89.408 128.524,89.408 134.112,89.408 150.876,89.408 156.464,89.408 173.228,89.408 184.404,89.408 189.992,89.408 195.58,89.408 212.344,89.408 217.932,89.408 61.005,90.645 62.865,90.643 64.836,90.645 66.566,90.645 68.402,90.645 69.698,90.645 30.734,94.996 36.322,94.996 41.91,94.996 47.498,94.996 81.026,94.996 148.082,94.996 153.67,94.996 159.258,94.996 164.846,94.996 170.434,94.996 176.022,94.996 220.726,94.996 27.94,100.584 33.528,100.584 67.056,100.584 72.644,100.584 78.232,100.584 83.82,100.584 89.408,100.584 100.584,100.584 106.172,100.584 128.524,100.584 150.876,100.584 184.404,100.584 189.992,100.584 195.58,100.584 206.756,100.584 217.932,100.584 41.91,106.172 47.498,106.172 75.438,106.172 120.142,106.172 131.318,106.172 148.082,106.172 153.67,106.172 159.258,106.172 176.022,106.172 209.55,106.172 27.94,111.76 33.528,111.76 39.116,111.76 44.704,111.76 61.468,111.76 67.056,111.76 72.644,111.76 106.172,111.76 111.76,111.76 117.348,111.76 178.816,111.76 184.404,111.76 195.58,111.76 30.734,117.348 108.966,117.348 120.142,117.348 176.022,117.348 187.198,117.348 192.786,117.348 209.55,117.348 215.138,117.348 220.726,117.348 39.116,122.936 67.056,122.936 72.644,122.936 89.408,122.936 94.996,122.936 100.584,122.936 111.76,122.936 178.816,122.936 195.58,122.936 201.168,122.936 217.932,122.936 218.581,127.798 30.734,128.524 64.262,128.524 75.438,128.524 81.026,128.524 86.614,128.524 103.378,128.524 108.966,128.524 114.554,128.524 120.142,128.524 131.318,128.524 142.494,128.524 153.67,128.524 164.846,128.524 176.022,128.524 198.374,128.524 203.962,128.524 209.55,128.524 218.592,129.159 44.704,134.112 50.292,134.112 55.88,134.112 61.468,134.112 67.056,134.112 72.644,134.112 83.82,134.112 94.996,134.112 100.584,134.112 111.76,134.112 122.936,134.112 173.228,134.112 178.816,134.112 184.404,134.112 201.168,134.112 47.498,139.7 53.086,139.7 75.438,139.7 97.79,139.7 103.378,139.7 114.554,139.7 142.494,139.7 164.846,139.7 192.786,139.7 198.374,139.7 203.962,139.7 215.138,139.7 220.726,139.7 27.94,145.288 33.528,145.288 44.704,145.288 50.292,145.288 55.88,145.288 72.644,145.288 78.232,145.288 111.76,145.288 117.348,145.288 122.936,145.288 128.524,145.288 134.112,145.288 150.876,145.288 156.464,145.288 162.052,145.288 178.816,145.288 201.168,145.288 88.041,150.317 88.876,150.323 30.734,150.876 41.91,150.876 75.438,150.876 103.378,150.876 114.554,150.876 120.142,150.876 125.73,150.876 131.318,150.876 136.906,150.876 142.494,150.876 170.434,150.876 203.962,150.876 209.55,150.876 88.051,151.143 88.869,151.147 96.902,155.305 39.116,156.464 72.644,156.464 111.76,156.464 117.348,156.464 122.936,156.464 128.524,156.464 201.168,156.464 36.322,162.052 41.91,162.052 53.086,162.052 187.198,162.052 192.786,162.052 198.374,162.052 209.55,162.052 220.726,162.052
K1A: K1.1 R28.1 U5.1 | length 104.3
  Top Layer w0.508: v1(150.028,56.236) K1.1@150.028,57.937 ; v1(184.506,56.24) 186.133,56.24 186.431,56.538 186.431,62.994 190.094,66.658 v1(190.094,81.813) ; v1(190.901,96.672) 188.017,96.672 187.668,97.021 R28.1@187.668,98.349 187.668,105.489 187.966,105.787 U5.1@199.187,105.787
  Bottom Layer w0.508: v1(150.028,56.236) v1@184.552,56.236 ; v1(190.094,81.813) 190.094,84.43 191.592,85.928 191.592,90.941 190.901,91.632 v1(190.901,96.672)
K1K: K1.8 R27.1 U5.2 | length 102.3
  Top Layer w0.508: K1.8@150.028,51.537 v1(150.028,53.188) ; v1(187.427,56.642) 187.427,62.763 191.262,66.599 v1(191.262,80.797) ; R27.1@190.991,98.349 190.991,102.032 192.123,103.164 199.724,103.164 200.457,103.896 U5.2@200.457,105.787 U5.2@200.432,105.762
  Bottom Layer w0.508: v1(150.028,53.188) 150.028,55.151 150.325,55.448 186.233,55.448 v1(187.427,56.642) ; v1(190.901,98.421) 192.811,96.512 192.811,85.776 191.262,84.226 v1(191.262,80.797)
K2A: K2.1 R26.1 U5.3 | length 85.2
  Top Layer w0.508: K2.1@151.069,70.205 151.095,70.231 v1(153.316,70.231) ; R26.1@194.301,98.349 194.301,102.206 194.599,102.503 201.429,102.503 201.727,102.801 U5.3@201.727,105.787
  Bottom Layer w0.508: v1(153.316,70.231) 153.344,70.231 153.432,70.32 193.103,70.32 194.158,71.374 194.158,89.306 194.412,89.56 v1(194.412,98.41)
K2K: K2.8 R25.1 U5.4 | length 90
  Top Layer w0.508: K2.8@151.069,63.805 v1(153.316,63.805) ; R25.1@197.749,98.349 197.749,101.437 198.047,101.734 201.632,101.734 202.997,103.099 U5.4@202.997,105.787
  Bottom Layer w0.508: v1(153.316,63.805) 153.316,67.751 155.092,69.526 194.52,69.526 194.945,69.952 194.945,85.065 197.763,87.883 v1(197.763,98.305)
K3A: K3.1 R24.1 U5.5 | length 67.8
  Top Layer w0.508: v1(172.06,67.742) 172.079,67.761 172.079,69.447 K3.1@172.1,69.469 ; R24.1@201.511,98.349 201.511,100.317 204.267,103.073 U5.5@204.267,105.787
  Bottom Layer w0.508: v1(172.06,67.742) 172.087,67.742 172.316,67.97 195.504,67.97 196.012,68.478 196.012,84.392 197.548,85.928 199.419,85.928 199.716,86.226 199.716,96.516 v1(201.498,98.298)
K3K: K3.8 R23.1 U5.6 | length 74.2
  Top Layer w0.508: K3.8@172.1,63.069 v1(172.1,64.948) ; R23.1@205.044,98.349 205.044,101.437 205.537,101.929 U5.6@205.537,105.787
  Bottom Layer w0.508: v1(172.1,64.948) 172.128,64.948 172.509,64.567 196.825,64.567 197.346,65.088 197.346,84.792 197.643,85.09 200.261,85.09 200.558,85.388 200.558,95.783 203.185,98.41 v1(205.003,98.41)
K4A: K4.1 R22.1 U5.7 | length 150.2
  Top Layer w0.508: K4.1@149.428,37.392 149.428,30.918 149.725,30.62 189.702,30.62 189.999,30.918 189.999,33.923 190.297,34.221 200.663,34.221 200.96,34.518 200.96,71.705 200.504,72.161 196.183,72.161 195.886,72.459 195.886,85.098 196.183,85.396 204.655,85.396 204.953,85.693 v1(204.953,88.875) ; v1(204.965,96.451) 204.993,96.451 205.723,97.18 206.509,97.18 206.807,97.478 206.807,98.051 207.104,98.349 R22.1@208.503,98.349 208.503,101.437 208.205,101.734 207.104,101.734 206.807,102.032 U5.7@206.807,105.787
  Bottom Layer w0.508: v1(204.953,88.875) 204.953,96.438 v1(204.965,96.451)
K4K: K4.8 R21.1 U5.9 | length 167.8
  Top Layer w0.508: K4.8@143.028,37.392 143.028,30.247 143.325,29.949 190.431,29.949 190.729,30.247 190.729,33.18 191.026,33.477 200.914,33.477 201.67,34.234 201.67,71.929 200.655,72.944 196.868,72.944 196.571,73.241 196.571,84.437 196.868,84.734 205.08,84.734 205.969,85.623 v1(205.969,88.875) ; v1(207.402,96.672) 211.48,96.672 211.829,97.021 211.829,110.852 211.353,111.328 208.124,111.328 U5.9@208.077,111.375
  Bottom Layer w0.508: v1(205.969,88.875) 205.969,95.239 v1(207.402,96.672)
"LINE IN L": C35.2 J3RF.A14 J6.T | length 40.1
  Top Layer w0.254: J6.T@29.16,166.5 26.292,166.5 25.933,166.141 25.933,159.766 26.199,159.5 J6.T@29.16,159.5 ; C35.2@29.794,162.027 29.794,160.606 29.16,159.972 J6.T@29.16,159.5 ; J3RF.A14@51.386,160.03 51.395,160.021 51.395,158.543 51.247,158.394 30.266,158.394 J6.T@29.16,159.5
"LINE IN R": C34.2 J3RF.A15 J6.R | length 29.7
  Top Layer w0.254: C34.2@32.157,162.027 32.157,160.478 33.128,159.507 v1(34.03,159.507) 34.523,160 J6.R@37.16,160 ; v1(34.025,157.55) 34.463,157.988 52.247,157.988 52.641,158.382 52.641,160.015 J3RF.A15@52.656,160.03
  Bottom Layer w0.254: v1(34.025,157.55) 34.027,157.552 34.027,159.504 v1(34.03,159.507)
"LINE OUT L": C36.2 J3RF.A11 J5.T | length 35.3
  Top Layer w0.254: J5.T@29.185,149.5 29.519,149.834 29.519,150.778 29.845,151.105 C36.2@29.845,152.527 29.845,155.367 29.185,156.028 J5.T@29.185,156.5 ; J3RF.A11@47.576,160.03 47.629,159.977 v1(47.629,159.056)
  Bottom Layer w0.254: J5.T@29.185,149.5 29.185,153.975 29.34,154.13 41.71,154.13 42.243,154.663 42.243,156.938 43.605,158.301 47.48,158.301 47.629,158.449 v1(47.629,159.056)
"LINE OUT R": C37.2 J3RF.A12 J5.R | length 23.7
  Top Layer w0.254: C37.2@34.307,150.017 C37.2@34.29,150 J5.R@37.185,150 ; J3RF.A12@48.846,160.03 48.855,160.021 48.855,159.055 v1(48.852,159.052)
  Bottom Layer w0.254: J5.R@37.185,150 42.288,150 42.707,150.419 42.707,156.828 43.763,157.884 48.703,157.884 48.852,158.032 v1(48.852,159.052)
MIC_IN: C30.2 J2.T J3RF.A1 R14.1 | length 52.1
  Top Layer w0.254: J2.T@29.312,146.5 29.312,137.668 30.455,136.525 C30.2@30.455,135.382 R14.1@32.791,135.382 ; v1(47.636,163.957) 47.636,165.619 J3RF.A1@47.676,165.659
  Bottom Layer w0.254: J2.T@29.312,146.5 27.895,146.5 27.552,146.843 27.552,150.218 28.778,151.444 28.778,154.429 28.927,154.578 41.583,154.578 41.732,154.727 41.732,157.003 43.453,158.724 46.354,158.724 46.663,159.032 46.663,161.748 47.636,162.721 v1(47.636,163.957)
NetBH1_1: BH1.1 F2.1 R63a.2 | length 36.1
  Bottom Layer w2.032: 98.095,106.68 110.78,106.68 112.183,105.277 112.183,90.176 114.589,87.77 BH1.1@117.5,87.77
NetBH1_2: BH1.2 BH1.3 R63.2 | length 99.8
  Top Layer w2.032: BH1.2@117.5,164.77 120.421,164.77
  Bottom Layer w2.032: BH1.2@117.5,164.77 135.173,164.77 140.334,159.608 140.334,87.935 BH1.3@140.5,87.77
NetBH1_4: BH1.4 BH1.5 R64.2 | length 101.4
  Top Layer w2.032: 137.668,164.77 BH1.4@140.5,164.77
  Bottom Layer w2.032: BH1.4@140.5,164.77 144.159,164.77 145.349,163.579 145.349,88.96 146.539,87.77 BH1.5@163.5,87.77
NetBH1_6: BH1.6 BH1.7 R65.2 | length 102.1
  Top Layer w2.032: BH1.6@163.5,164.77 163.542,164.811 166.393,164.811
  Bottom Layer w2.032: BH1.6@163.5,164.77 163.729,164.998 181.357,164.998 188.773,157.582 188.773,103.886 186.5,101.613 BH1.7@186.5,87.77
NetBH1_8: BH1.8 BH1.9 R66.2 | length 101.4
  Top Layer w2.032: 183.742,164.719 186.449,164.719 BH1.8@186.5,164.77
  Bottom Layer w2.032: BH1.8@186.5,164.77 202.362,164.77 212.522,154.61 212.522,96.672 209.5,93.651 BH1.9@209.5,87.52
NetBH1_10: BH1.10 R67.2 R68.1 | length 6
  Top Layer w2.032: 206.959,164.821 R68.1@212.974,164.821
NetBH1_12: BH1.12 C125c.1 M9e.2 | length 166.2
  Top Layer w0.254: C125c.1@87.625,139.472 87.634,139.481 87.634,140.335 ; M9e.2@87.625,143.891 87.625,140.344 87.634,140.335 ; v1(88.841,140.747) 87.782,140.747 87.634,140.598 87.634,140.335 ; v1(118.832,118.262) 127.08,118.262 127.229,118.114 127.229,113.005 127.531,112.703 v1(148.258,112.703) ; v1(178.185,120.04) 184.201,120.04 184.642,120.482 184.642,124.323 184.83,124.511 v1(192.049,124.511)
  Bottom Layer w0.254: v1(88.841,140.747) 105.633,140.747 106.629,139.751 106.629,118.411 106.778,118.262 v1(118.832,118.262) ; v1(148.258,112.703) 164.433,112.703 165.35,111.785 177.267,111.785 178.185,112.703 v1(178.185,120.04) ; v1(192.049,124.511) 192.491,124.952 BH1.12@209.598,124.952
NetBH1_14: BH1.14 C125b.1 M9f.2 | length 107
  Top Layer w0.254: C125b.1@85.376,139.472 85.376,140.874 85.776,141.274 v1(85.776,142.291) 85.776,143.896 M9f.2@85.749,143.923 ; v1(126.162,121.183) 127.531,121.183 128.013,120.701 v1(161.163,120.701)
  Bottom Layer w0.254: v1(85.776,142.291) 119.19,142.291 119.558,141.923 119.558,130.683 119.939,130.302 125.847,130.302 126.162,129.987 v1(126.162,121.183) ; v1(161.163,120.701) 161.624,120.701 161.773,120.85 161.773,124.536 162.148,124.912 BH1.14@163.581,124.912
NetBH1_16: BH1.16 C125d.1 M9m.1 | length 56.9
  Top Layer w0.254: C125d.1@80.741,139.472 80.741,141.029 81.14,141.428 83.932,141.428 ; M9m.1@83.932,143.517 83.932,141.428 ; v1(84.669,141.424) 84.665,141.428 83.932,141.428
  Bottom Layer w0.254: v1@84.68,141.428 117.17,141.428 117.645,140.953 BH1.16@117.645,124.918
NetC3_1: C3.1 C7.1 C11.1 L1.2 | length 11.1
  Top Layer w0.254: C3.1@140.536,125.07 143.889,125.07 L1.2@143.933,125.026 143.976,125.07 C7.1@147.75,125.07 C11.1@151.56,125.07
NetC3_2: C3.2 U1.3 U1.13 | length 17.2
  Top Layer w0.254: U1.13@131.47,137.185 133.909,137.185 135.179,135.915 U1.3@137.058,135.915 138.887,135.915 139.268,135.534 139.268,130.734 140.536,129.466 C3.2@140.536,127.356
NetC4_1: C4.1 C8.1 C12.1 L2.2 | length 11.5
  Top Layer w0.254: C4.1@140.53,141.986 C4.1@140.538,141.994 140.547,141.986 L2.2@144.346,141.986 144.39,141.943 C8.1@148.149,141.943 C12.1@151.959,141.943
NetC4_2: C4.2 U1.5 U1.11 | length 10.7
  Top Layer w0.254: U1.11@131.47,139.725 133.96,139.725 135.23,138.455 U1.5@137.058,138.455 140.31,138.455 140.538,138.684 C4.2@140.538,139.708
NetC5_1: C5.1 C9.2 C13.1 L3.2 | length 11.4
  Top Layer w0.254: C5.1@140.538,148.978 140.582,149.022 L3.2@144.321,149.022 144.364,148.978 148.131,148.978 C13.1@151.934,148.978
NetC5_2: C5.2 U1.6 U1.10 | length 15.6
  Top Layer w0.254: U1.10@131.47,140.995 134.061,140.995 135.331,139.725 U1.6@137.058,139.725 138.956,139.725 139.268,140.038 139.268,143.104 140.538,144.374 C5.2@140.538,146.692
NetC6_1: C6.1 C10.2 C14.1 L4.2 | length 11.3
  Top Layer w0.254: C6.1@140.527,132.436 144.092,132.436 L4.2@144.136,132.392 144.179,132.436 147.946,132.436 C14.1@151.763,132.436
NetC6_2: C6.2 U1.4 U1.12 | length 11.6
  Top Layer w0.254: U1.12@131.47,138.455 134.061,138.455 135.331,137.185 U1.4@137.058,137.185 139.827,137.185 140.527,136.485 C6.2@140.527,134.722
NetC11_2: C11.2 L5.1 | length 3.8
  Top Layer w0.254: C11.2@151.56,127.356 151.603,127.312 L5.1@155.363,127.312
NetC12_2: C12.2 L6.1 | length 3.8
  Top Layer w0.254: C12.2@151.959,139.657 152.003,139.7 L6.1@155.776,139.7
NetC13_2: C13.2 L7.1 | length 3.8
  Top Layer w0.254: C13.2@151.934,146.692 151.977,146.736 L7.1@155.751,146.736
NetC14_2: C14.2 L8.1 | length 3.8
  Top Layer w0.254: C14.2@151.763,134.722 155.522,134.722 L8.1@155.566,134.678
NetC15_1: C15.1 C19.2 L5.2 L9.2 | length 11.4
  Top Layer w0.254: L5.2@155.363,125.026 L9.2@159.173,125.026 C19.2@166.793,125.026
NetC16_1: C16.1 C20.2 L6.2 L10.2 | length 11.4
  Top Layer w0.254: L6.2@155.776,141.986 L10.2@159.586,141.986 C20.2@167.206,141.986
NetC17_2: C17.2 C21.2 L7.2 L11.2 | length 11.4
  Top Layer w0.254: L7.2@155.751,149.022 L11.2@159.561,149.022 C17.2@163.371,149.022 C21.2@167.181,149.022
NetC18_2: C18.2 C22.2 L8.2 L12.2 | length 11.4
  Top Layer w0.254: L8.2@155.566,132.392 L12.2@159.376,132.392 C18.2@163.186,132.392 C22.2@166.996,132.392
NetC19_1: C19.1 U2.3 U2.13 | length 18.2
  Top Layer w0.254: C19.1@166.793,127.312 166.793,129.709 168.183,131.099 168.183,134.947 168.974,135.738 171.644,135.738 U2.13@171.698,135.792 173.91,135.792 175.18,134.522 U2.3@177.286,134.522
NetC20_1: C20.1 U2.5 U2.11 | length 11.8
  Top Layer w0.254: C20.1@167.206,139.7 167.206,138.615 167.489,138.332 U2.11@171.698,138.332 173.834,138.332 175.104,137.062 U2.5@177.286,137.062
NetC21_1: C21.1 U2.6 U2.10 | length 16.7
  Top Layer w0.254: C21.1@167.181,146.736 167.181,144.782 168.326,143.637 168.326,140.259 168.983,139.602 U2.10@171.698,139.602 174.164,139.602 175.434,138.332 U2.6@177.286,138.332
NetC22_1: C22.1 U2.4 U2.12 | length 12.9
  Top Layer w0.254: C22.1@166.996,134.678 166.996,136.569 167.489,137.062 U2.12@171.698,137.062 173.91,137.062 175.18,135.792 U2.4@177.286,135.792
NetC29_1: C29.1 Q1.1 R13.1 R13e.1 | length 8.8
  Bottom Layer w0.254: C29.1@48.734,143.152 48.692,143.195 Q1.1@48.692,145.974 52.057,145.974 R13.1@52.181,145.851 53.252,145.851 53.53,145.573 R13e.1@54.463,145.573
NetC29a_1: C29a.1 R13a.2 R13b.1 | length 15
  Bottom Layer w0.305: C29a.1@51.92,137.922 54.204,137.922 55.88,139.598 55.88,144.195 56.059,144.374 R13a.2@57.48,144.374 57.556,144.45 R13b.1@57.556,148.463
NetC29b_1: C29b.1 D1.2 P1.1 R13b.2 | length 16.7
  Bottom Layer w0.254: D1.2@47.629,154.788 52.248,154.788 ; P1.1@52.248,152.375 52.248,154.788 ; C29b.1@55.88,156.056 54.717,156.056 53.448,154.788 52.248,154.788 ; C29b.1@56.214,156.052 57.556,156.052 R13b.2@57.556,151.892
NetC39_1: C39.1 J7.T R16.2 | length 12.3
  Top Layer w0.254: J7.T@29.169,116.5 J7.T@29.169,123.5 32.002,123.5 32.004,123.498 C39.1@32.004,121.082 C39.1@31.939,121.146
NetC40_2: C40.2 J7.R R17.2 | length 5.5
  Top Layer w0.254: R17.2@32.002,116.154 36.062,116.154 36.908,117 J7.R@37.169,117
NetC41_1: C41.1 J8.T R18.2 | length 12.4
  Top Layer w0.254: C41.1@29.108,103.962 J8.T@29.108,106.5 ; J8.T@29.108,113.5 J8.T@29.108,106.5 ; R18.2@31.979,106.5 J8.T@29.108,106.5
NetC42_2: C42.2 J8.R U4.4 | length 151.1
  Top Layer w0.254: C42.2@34.315,106.985 34.331,107 J8.R@37.108,107 37.108,101.086 37.509,100.686 v1(58.852,100.686) ; v1(89.166,101.57) 89.238,101.498 121.632,101.498 125.847,97.283 125.847,93.681 126.717,92.812 131.283,92.812 132.588,91.507 132.588,91.182 132.737,91.034 162.712,91.034 163.427,91.749 U4.4@163.427,94.183
  Bottom Layer w0.254: v1(58.852,100.686) 58.852,96.627 59.332,96.146 69.171,96.146 69.835,96.81 77.303,96.81 82.063,101.57 v1(89.166,101.57)
NetC43_1: C43.1 M13.1 R21.2 R22.2 R23.2 R24.2 R25.2 R26.2 R27.2 R28.2 U5.16 | length 60.7
  Top Layer w0.508: C43.1@195.081,115.384 M13.1@197.406,115.384 197.406,111.404 ; U5.16@199.187,111.375 199.157,111.404 197.406,111.404 ; R21.2@211.88,94.92 R22.2@208.503,94.92 R23.2@205.044,94.92 R24.2@201.511,94.92 R25.2@197.8,94.92 R26.2@194.352,94.92 R27.2@190.991,94.92 R28.2@187.668,94.92 185.895,94.92 185.598,95.217 185.598,100.577 185.641,100.577 186.512,101.448 186.512,105.537 187.579,106.604 196.342,106.604 197.406,107.668 197.406,111.404
NetC44_2: C44.2 M17.2 U5.12 | length 11.3
  Top Layer w0.254: U5.12@204.267,111.375 204.267,113.084 204.416,113.233 205.208,113.233 205.867,113.893 205.867,117.098 206.417,117.648 C44.2@207.441,117.648 207.402,117.687 M17.2@207.402,120.244
NetC45_2: C45.2 M16.2 U5.13 | length 10.2
  Top Layer w0.254: U5.13@202.997,111.375 202.997,113.233 203.683,113.919 203.683,117.521 203.831,117.67 C45.2@204.845,117.67 204.851,117.675 M16.2@204.851,120.244
NetC46_2: C46.2 M15.2 U5.14 | length 10.2
  Top Layer w0.254: U5.14@201.727,111.375 201.676,111.426 201.676,113.005 201.193,113.487 201.193,117.428 201.414,117.648 C46.2@202.382,117.648 202.387,117.654 M15.2@202.387,120.244 M15.2@202.382,120.238
NetC47_2: C47.2 M14.2 U5.15 | length 10.7
  Top Layer w0.254: M14.2@199.921,120.244 199.921,117.697 C47.2@199.916,117.692 199.724,117.5 198.777,117.5 198.628,117.352 198.628,114.594 200.457,112.765 U5.15@200.457,111.375
NetC48_2: C48.2 C49.2 K4.3 K4.6 L13.1 | length 52.7
  Top Layer w0.762: K4.6@143.028,42.792 143.035,42.799 v1(144.831,42.799) ; K4.3@149.428,42.792 v1(151.487,42.792) 152.485,43.79 168.047,43.79 169.85,45.593 180.645,45.593 181.439,44.799 181.439,40.792 ; C49.2@180.086,40.792 181.439,40.792 ; C48.2@181.445,35.45 C48.2@181.442,35.447 181.44,35.449 L13.1@181.439,38.705 L13.1@181.439,38.705 181.439,40.792
  Bottom Layer w0.762: v1(144.831,42.799) 151.48,42.799 v1(151.487,42.792)
NetC49_1: C49.1 C50.2 C51.2 C52.2 L13.2 L14.1 | length 19.8
  Top Layer w0.762: C52.2@168.239,41.036 168.239,39.293 168.685,38.846 169.542,38.846 L14.1@169.683,38.705 ; C51.2@169.695,35.447 169.689,35.453 169.689,38.699 L14.1@169.683,38.705 ; C50.2@176.439,35.45 L13.2@176.439,38.705 ; C49.1@177.8,40.792 177.8,39.293 177.354,38.846 176.58,38.846 L13.2@176.439,38.705 ; L14.1@169.683,38.705 L13.2@176.439,38.705
NetC52_1: C52.1 C53.2 C54.2 L14.2 L15.1 | length 16.8
  Top Layer w0.762: C54.2@156.466,41.036 156.466,39.293 156.913,38.846 157.612,38.846 L15.1@157.754,38.705 L14.2@164.683,38.705 ; C53.2@164.675,35.447 164.679,35.451 164.679,38.701 L14.2@164.683,38.705 ; C52.1@165.953,41.036 165.762,40.845 165.891,40.845 165.891,39.321 165.416,38.846 164.824,38.846 L14.2@164.683,38.705
NetC54_1: C54.1 C55.2 L15.2 M12.1 | length 9.6
  Top Layer w0.762: C55.2@152.723,35.45 C55.2@152.738,35.465 ; C54.1@154.18,41.036 154.18,39.136 153.734,38.69 152.769,38.69 L15.2@152.754,38.705 152.738,38.69 C55.2@152.738,35.465 ; M12.1@155.483,35.48 M12.1@155.462,35.501 155.436,35.475 152.749,35.475 C55.2@152.738,35.465
NetC56_2: C56.2 K1.5 L16.1 | length 7.4
  Top Layer w0.762: C56.2@137.287,51.537 139.615,51.537 ; L16.1@139.615,49.316 139.615,51.537 ; K1.5@142.428,51.537 139.615,51.537
NetC57_2: C57.2 L16.2 L17.1 | length 9.3
  Top Layer w0.762: C57.2@137.287,54.331 137.294,54.323 139.607,54.323 L16.2@139.615,54.316 139.64,54.341 139.64,61.229 L17.1@139.665,61.254
NetC58_2: C58.2 C59.2 L17.2 L18.1 | length 11.9
  Top Layer w0.762: C58.2@137.058,66.254 L17.2@139.665,66.254 L18.1@139.665,72.963 C59.2@137.058,72.963
NetC59_1: C59.1 C60.2 K2.3 L18.2 | length 34.7
  Top Layer w0.762: C59.1@137.058,75.249 C60.2@137.058,77.963 L18.2@139.665,77.963 139.806,77.822 140.496,77.822 141.033,77.285 141.033,62.092 141.479,61.646 144.181,61.646 144.628,62.092 144.628,66.741 145.669,67.783 K2.3@145.669,70.205
NetC61_2: C61.2 K2.2 L19.1 | length 18.2
  Top Layer w0.762: K2.2@147.869,70.205 147.869,68.243 146.828,67.201 146.828,61.298 147.42,60.706 151.487,60.706 152.443,59.75 L19.1@152.643,59.75 152.643,59.721 153.401,58.963 C61.2@153.401,57.633
NetC62_2: C62.2 L19.2 L20.1 | length 9.1
  Top Layer w0.762: L19.2@157.643,59.75 157.668,59.775 159.212,59.775 ; C62.2@159.224,57.633 159.224,59.763 159.212,59.775 ; L20.1@164.555,59.801 164.53,59.775 159.212,59.775
NetC63_2: C63.2 C64.2 L20.2 L21.1 | length 12.4
  Top Layer w0.762: L20.2@169.555,59.801 L21.1@176.366,59.801 ; C63.2@176.341,62.255 176.354,62.243 176.354,59.814 L21.1@176.366,59.801 ; C64.2@177.8,57.785 177.8,59.213 177.354,59.66 176.508,59.66 L21.1@176.366,59.801
NetC64_1: C64.1 C65.2 K3.7 L21.2 | length 23.2